# EAGLE board InputDevice (EAGLE 7.6.0)
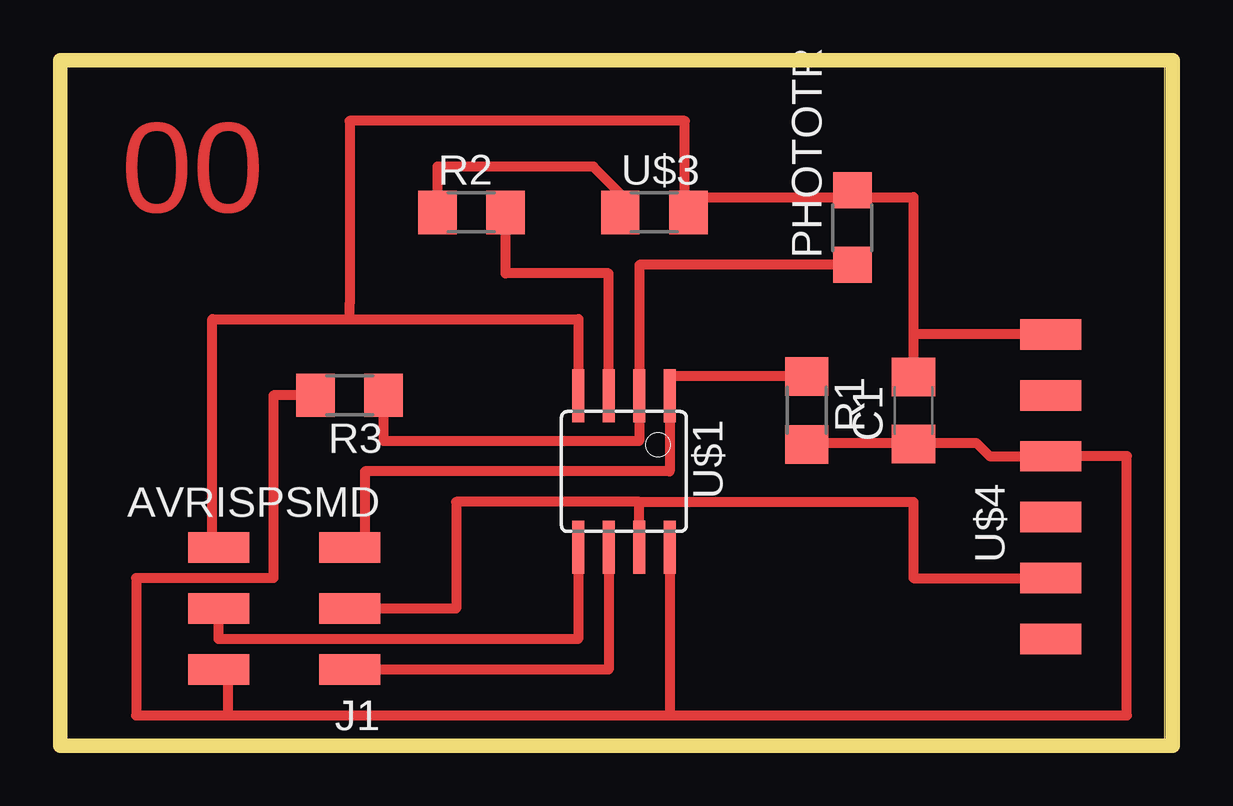
[diagram p0: board, top side]

Size 46.35 x 28.57 mm. Coordinates in mm from the lower left corner, seen from the top.
Outline: 0,0 46.02,0 46.02,28.57 0,28.57 0,0
Outline: 0,0 46.35,0 46.35,28.57 0,28.57 0,0
Copper layers (1*16): Top 0.035mm / dielectric 1.5mm / Bottom 0.035mm
Design rules "default *": minimum track width 10mil, minimum drill 24mil, track to track 16mil, track to pad 16mil, pad to pad 16mil, via to via 16mil, smd to smd 16mil, copper to edge 40mil, drill to drill 8mil, minimum pad ring 10mil, minimum via ring 8mil, stop-mask expansion 4mil, vias tented up to drill 0mil, thermal gap 10mil

## Footprints (pad centres in the part's own frame; a part is rotated, then mirrored left to right if it is on the bottom)
C1206 = smd 1.6 x 1.8: 1 -1.4,0; 2 1.4,0
2X03SMD = smd 2.54 x 1.27: 1 -2.54,2.54; 2 2.92,2.54; 3 -2.54,0; 4 2.92,0; 5 -2.54,-2.54; 6 2.92,-2.54
OP1206 = smd 1.5 x 1.6: COLLECTOR -1.55,0; EMITTER 1.55,0
R1206 = smd 1.6 x 1.803: 1 -1.422,0; 2 1.422,0
1206 = smd 1.6 x 1.803: 1 -1.422,0; 2 1.422,0
SOIC8 = smd 0.5 x 2.2: 1 -1.905,-3.154; 2 -0.645,-3.154; 3 0.625,-3.154; 4 1.895,-3.154; 5 1.905,3.154; 6 0.635,3.154; 7 -0.635,3.154; 8 -1.905,3.154
1X06SMD = smd 2.54 x 1.27: 1 0,6.35; 2 0,3.81; 3 0,1.27; 4 0,-1.27; 5 0,-3.81; 6 0,-6.35

## Placement (x,y rotation side)
C1  1uf  [C1206]  35.56,13.97 90 top
J1  AVRISPSMD  [2X03SMD]  9.53,5.71 180 top
PHOTOTR  [OP1206]  33.02,21.59 90 top
R1  10k  [R1206]  31.12,13.97 270 top
R2  499  [1206]  17.15,22.22 0 top
R3  49.9k  [1206]  12.06,14.61 180 top
U$1  ATTINY45SI  [SOIC8]  23.5,11.43 180 top
U$3  LED  [1206]  24.77,22.22 0 top
U$4  FTDI-SMD-HEADER  [1X06SMD]  41.27,10.79 0 top

## Library data of the parts
C1 = rcl
J1 U$1 U$4 = fab
PHOTOTR = 01_fab
R1 = resistor
R2 R3 U$3 = ng

## Nets
GND: C1.2 J1.6 PHOTOTR.EMITTER U$1.4 U$3.2 U$4.1
LED: R2.2 U$1.3
MISO: J1.1 U$1.6
MOSI: J1.4 U$1.5
N$1: R2.1 U$3.1
PA: PHOTOTR.COLLECTOR R3.1 U$1.2
RST: J1.5 R1.1 U$1.1
SCK: J1.3 U$1.7 U$4.5
VCC: C1.1 J1.2 R1.2 R3.2 U$1.8 U$4.3

## Tracks (layer width: path | path; a pad name or v marks a point on that pad's centre or on a via)
GND
  Top 0.254: 26.72,22.86 26.39,22.53 U$3.2
  Top 0.406: 26.72,22.86 33.02,22.86 | 33.02,22.86 PHOTOTR.EMITTER | 33.02,22.86 35.56,22.86 35.56,17.14 | 35.56,17.14 C1.2 | U$4.1 35.56,17.14 | U$3.2 26.04,22.22 26.04,26.04 12.06,26.04 12.06,18.41 12.06,17.78 | 12.06,17.78 21.6,17.78 U$1.4 | J1.6 6.35,8.25 6.35,17.78 12.06,17.78
LED
  Top 0.406: U$1.3 22.86,19.68 18.57,19.68 R2.2
MISO
  Top 0.305: 11.43,3.18 J1.1
  Top 0.406: U$1.6 22.86,3.18 J1.1
MOSI
  Top 0.406: U$1.5 21.59,4.45 6.6,4.45 J1.4
N$1
  Top 0.406: U$3.1 23.34,23.01 22.23,24.13 15.72,24.13 R2.1
PA
  Top 0.406: PHOTOTR.COLLECTOR 24.14,20.04 U$1.2 24.13,12.7 13.49,12.7 R3.1
RST
  Top 0.406: R1.1 25.4,15.39 U$1.1 25.4,11.43 12.7,11.43 12.7,8.25 J1.5 11.43,8.25
SCK
  Top 0.406: 24.13,10.16 35.56,10.16 35.56,6.98 U$4.5 | U$1.7 24.13,10.16 | 24.13,10.16 16.51,10.16 16.51,5.71 J1.3
VCC
  Top 0.254: 31.34,12.62 R1.2 | 41.25,12.29 U$4.3
  Top 0.406: U$1.8 25.4,1.27 | 25.4,1.27 44.45,1.27 44.45,12.07 U$4.3 38.73,12.07 38.18,12.62 36.2,12.62 | R3.2 8.89,14.61 8.89,6.98 3.17,6.98 3.17,1.27 6.98,1.27 | 6.98,1.27 25.4,1.27 | J1.2 6.98,3.18 6.98,1.27 | 31.34,12.62 36.2,12.62 | 36.2,12.62 36.2,12.7 36.06,12.57 C1.1

## Text on the board
Top: 00